# Altium PCB PCB_AD_源文件.pcbdoc
Units mil, origin at the board's own origin, x right, y up, seen from the top; angles counter-clockwise.
Board outline 2790 x 2779.26 mil, 2 copper layers (Top Layer, Bottom Layer); 60 components, 65 nets, 220 pads, 132 vias.
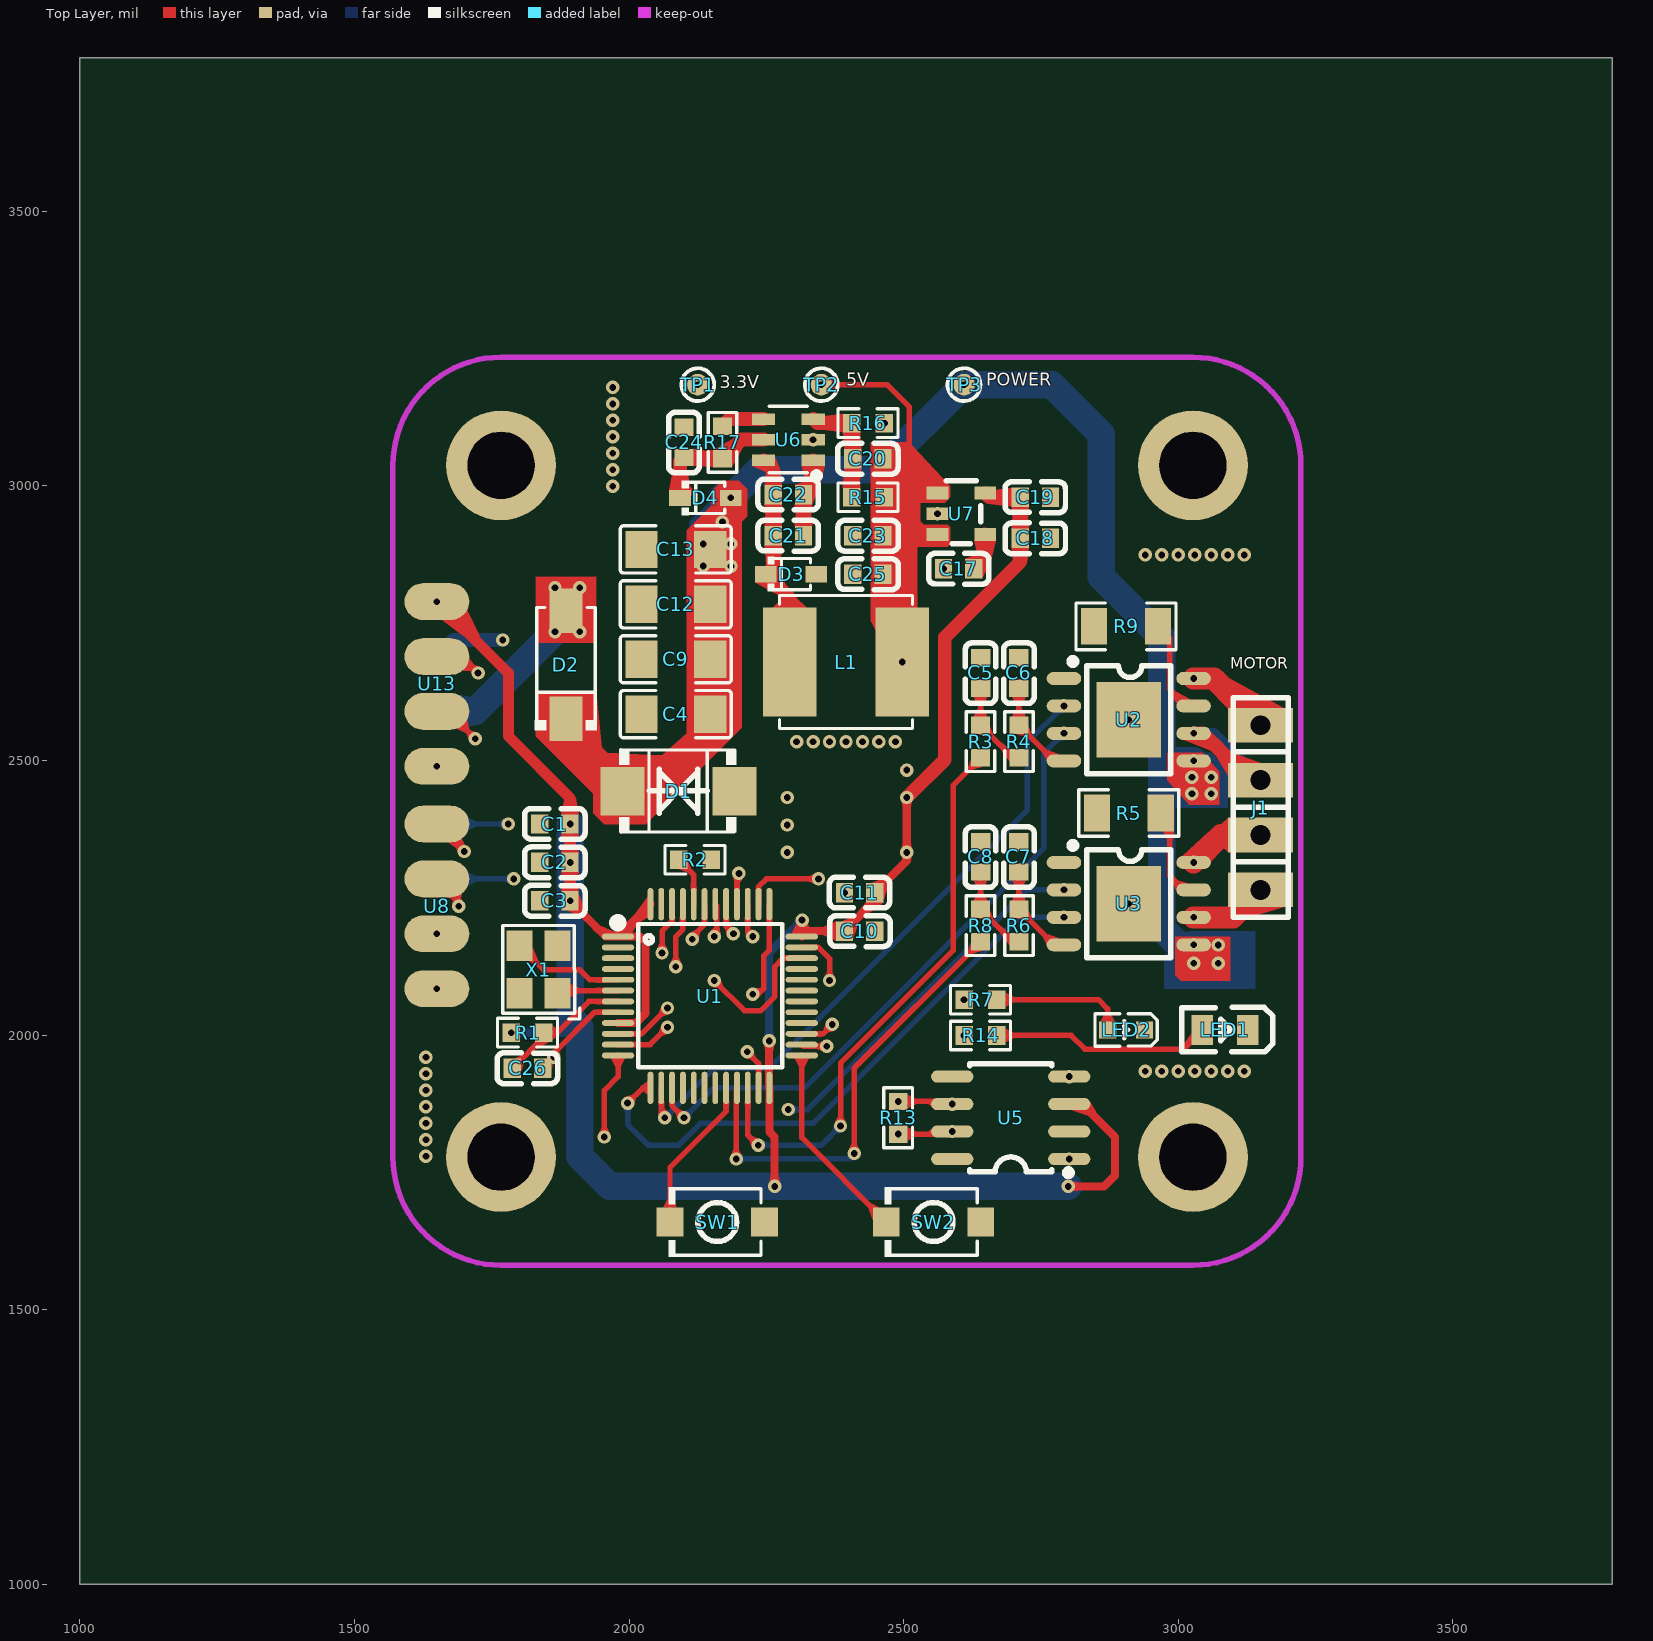
[diagram p0: Top Layer view]
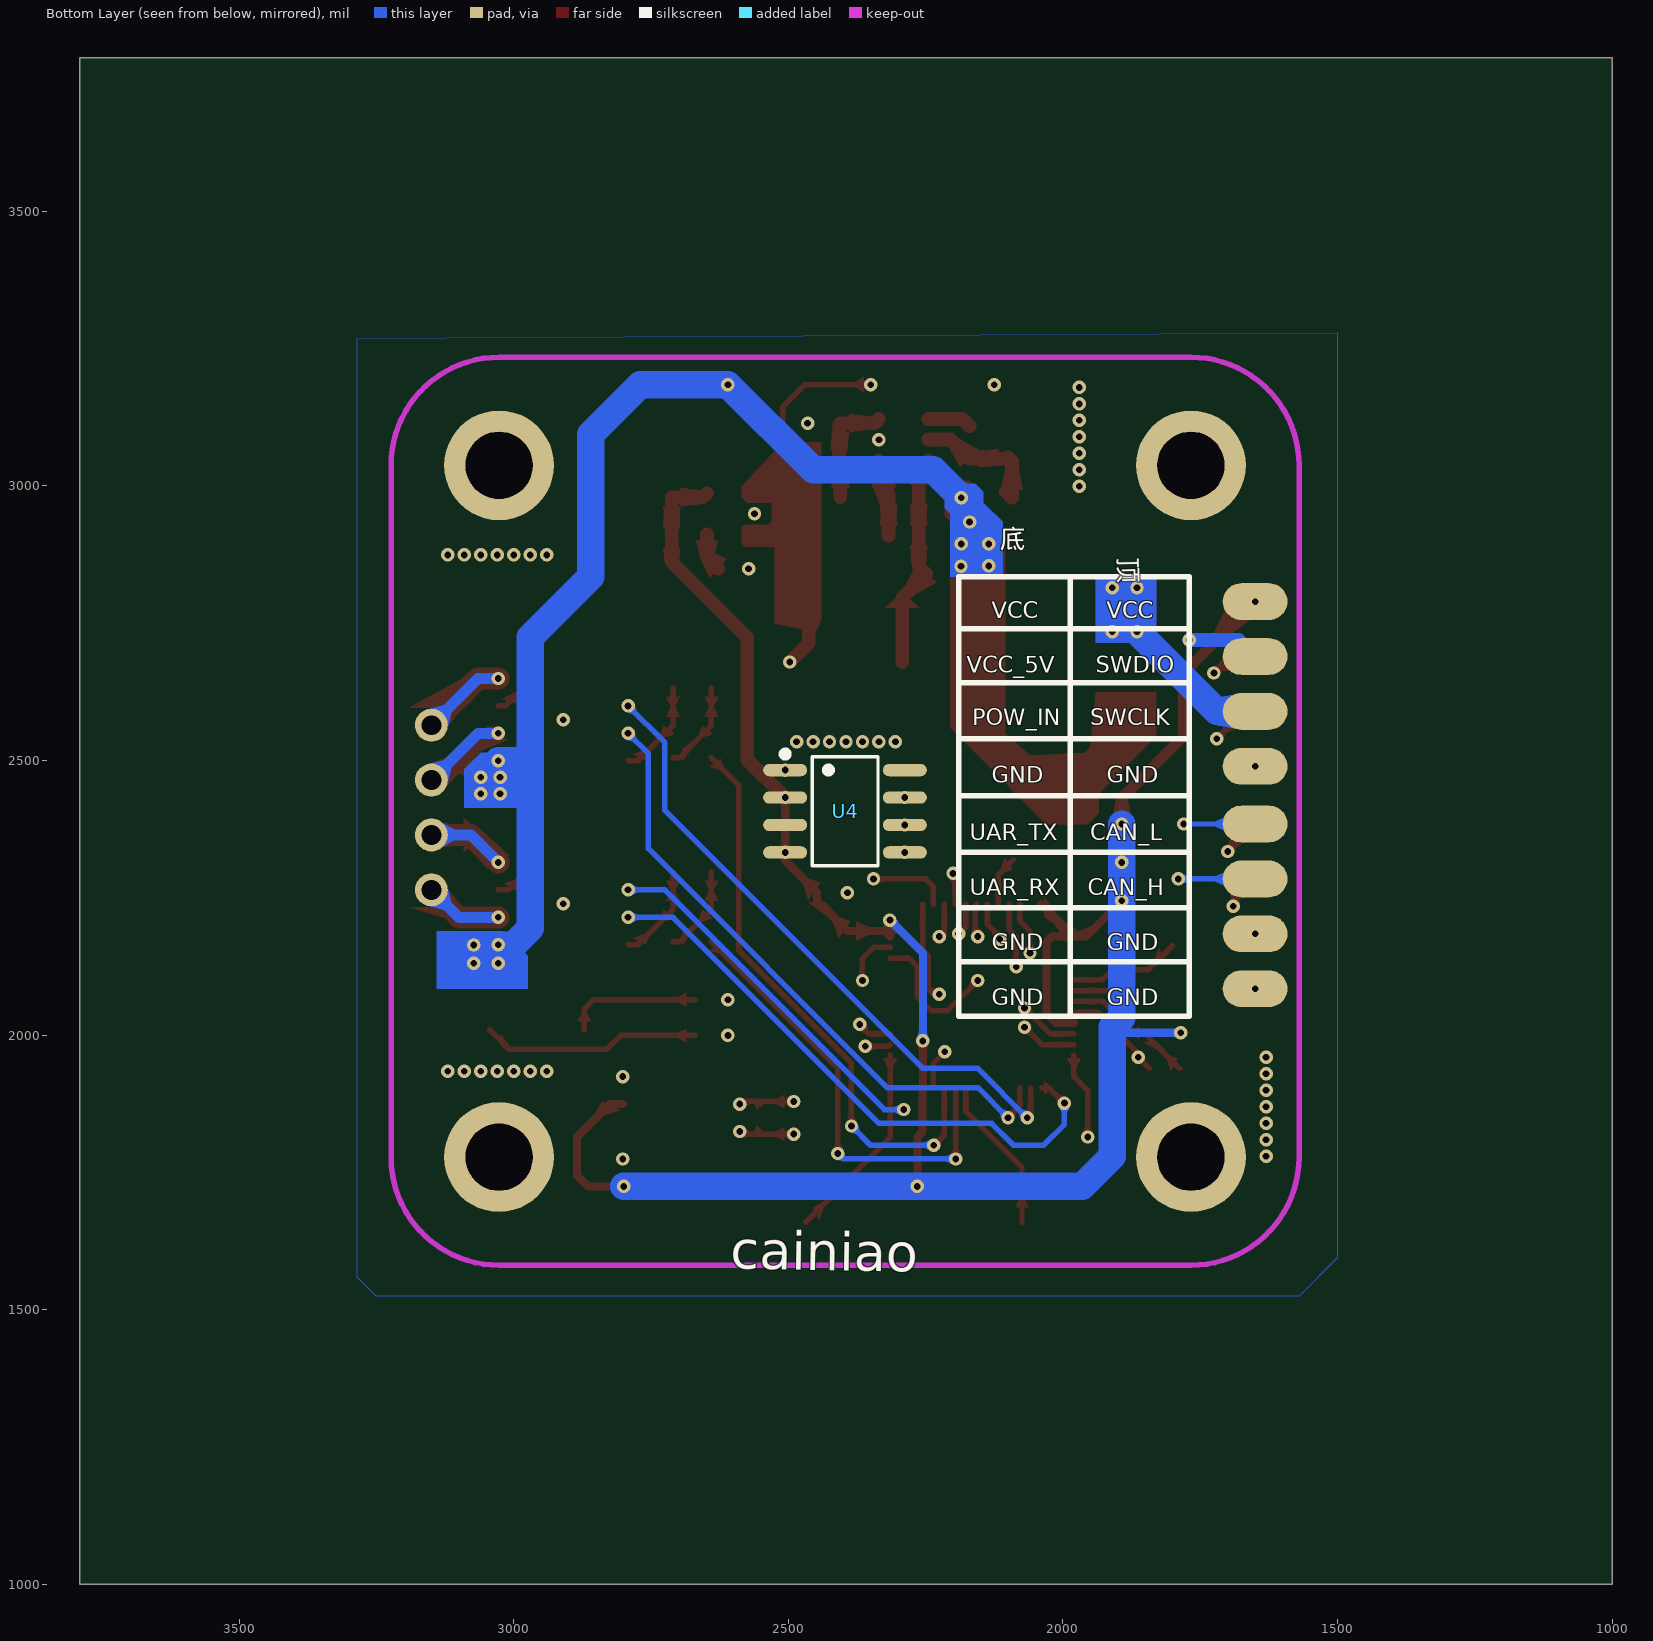
[diagram p1: Bottom Layer view, seen from below]

## Layer stack, top to bottom
Top Layer: signal copper (thickness not stored)
Dielectric: dielectric 12.6, FR-4, Dk 4.8
Bottom Layer: signal copper (thickness not stored)

## Board outline
3790,1000 1000,1000 1000,3779.26 3790,3779.26

## Components (designator, comment, footprint, x,y, rotation, side; value= is the part's Value field where it differs from the comment)
C1 "0.1u" C0603 1865,2384.26 r0 top
C2 "0.1u" C0603 1865,2314.26 r0 top
C3 "0.1u" C0603 1865,2244.26 r0 top
C4 "100uF" C1206 2085,2584.26 r0 top
C5 "0.1u" C0603 2640,2659.26 r90 top
C6 "0.1u" C0603 2710,2659.26 r90 top
C7 "0.1u" C0603 2710,2324.26 r90 top
C8 "0.1u" C0603 2640,2324.26 r90 top
C9 "100uF" C1206 2085,2684.26 r0 top
C10 "0.1u" C0603 2420,2189.26 r180 top
C11 "10nf" C0603 2420,2259.26 r0 top
C12 "100uF" C1206 2085,2784.26 r0 top
C13 "100uF" C1206 2085,2884.26 r0 top
C17 "10nf" C0603 2600,2849.26 r180 top
C18 "0.1uf" C0603 2740,2904.26 r0 top
C19 "10nf" C0603 2740,2979.26 r0 top
C20 "100pf" C0603 2435,3049.26 r0 top
C21 "0.1u" C0603 2290,2909.26 r0 top
C22 "0.1u" C0603 2290,2984.26 r0 top
C23 "10uf" C0603 2435,2909.26 r180 top
C24 "10uf/50v" C0603 2100,3079.26 r90 top
C25 "0.1u" C0603 2435,2839.26 r180 top
C26 "0.1u" C0603 1815,1939.26 r0 top
D1 "P6SMB6.8CA-C78395" SMB_L4.6-W3.6-LS5.3-BI 2090,2444.26 r180 top
D2 "SS54_C22452" SMA_L4.4-W2.8-LS5.4-R-RD 1885,2674.26 r90 top
D3 "B5819WS" SOD-323_L1.8-W1.3-LS2.5-RD 2295,2839.26 r0 top
D4 "B5819WS" SOD-323_L1.8-W1.3-LS2.5-RD 2138.84,2978.15 r0 top
J1 "CON4_1" 排针4PIN 3100,2614.26 r0 top
L1 "6.8uH" IND-SMD_L6.0-W6.0_SWPA6045S 2395,2679.26 r0 top
LED1 "17-21SURC/S530-A3/TR8" LED0805-R-RD 3085,2009.26 r180 top
LED2 "TJ-S1608SW6TGLCCW-A5" LED0603-R-RD 2905,2009.26 r180 top
R1 "10k" R0603 1815,2004.26 r0 top
R2 "10k" R0603 2120,2319.26 r0 top
R3 "1k" R0603 2640,2534.26 r90 top
R4 "1k" R0603 2710,2534.26 r90 top
R5 "100mΩ" R1206 2910,2404.26 r180 top
R6 "1k" R0603 2710,2199.26 r90 top
R7 "100" R0603 2640,2064.26 r180 top
R8 "1k" R0603 2640,2199.26 r90 top
R9 "100mΩ" R1206 2905,2744.26 r180 top
R13 "120" R0603 2490,1849.26 r270 top
R14 "100" R0603 2640,1999.26 r180 top
R15 "10k" R0603 2435,2979.26 r0 top
R16 "1.8k" R0603 2435,3114.26 r180 top
R17 "1m" R0603 2170,3079.26 r270 top
SW1 "TS-1088R-02526" SW-SMD_L3.9-W3.0-P4.45 2160.55,1659.46 r180 top
SW2 "TS-1088R-02526" SW-SMD_L3.9-W3.0-P4.45 2554.25,1659.46 r180 top
TP1 "测试点" 测试点 2125,3184.26 r0 top
TP2 "测试点" 测试点 2350,3184.26 r0 top
TP3 "测试点" 测试点 2610,3184.26 r0 top
U1 "STM32F103CBT6" LQFP-48_L7.0-W7.0-P0.50-LS9.0-BL 2147.2,2071.03 r270 top
U2 "TB67H450FNG" SOP-8_L4.9-W3.9-P1.27-LS6.0-TL-EP 2910,2574.26 r0 top
U3 "TB67H450FNG" SOP-8_L4.9-W3.9-P1.27-LS6.0-TL-EP 2910,2239.26 r0 top
U4 "MT6816CT-AKD" SOP-8_L5.0-W4.0-P1.27-LS6.0-BL 2396.77,2407.49 r90 bottom
U5 "SN65HVD232DR" SOIC-8_L5.0-W4.0-P1.27-LS6.0-BL 2695,1849.26 r90 top
U6 "ME3116" SOT-23-6_L2.9-W1.6-P0.95-LS2.8-BL 2290,3084.26 r90 top
U7 "TPLP2992IM5X-3.3" SOT-23-5_L2.9-W1.6-P0.95-LS2.8-BL 2605,2949.26 r270 top
U8 "Heaer-侧2*4" 侧焊2*4排针 1650,2184.26 r0 top
U13 "Heaer-侧2*4" 侧焊2*4排针 1650,2589.26 r0 top
X1 "12MHz" OSC-SMD_4P-L3.2-W2.5-BL 1835,2119.26 r90 top

## Footprints (in the part's own frame and the unit in brackets; to place one, negate y for a bottom-side part, rotate by r counter-clockwise, add the part's x,y. Pads: shape width x height; smd on the part's side, far side on the other; paste and mask are expansions set on the pad)
C0603 [mm]
  rect 0.8x0.9 smd paste+0 mask+0.051: 1(-0.7,0) 2(0.7,0)
  silkscreen extent -1.41,-0.71 1.39,0.72
C1206 [mm]
  rect 1.485x1.728 smd paste-100 mask+0.051: 1(-1.593,0) 2(1.593,0)
  silkscreen extent -2.56,-1.09 2.56,1.09
IND-SMD_L6.0-W6.0_SWPA6045S [mm]
  rect 2.474x5.02 smd paste+0 mask+0.051: 1(-2.603,0) 2(2.603,0)
  silkscreen extent -3.08,-3.08 3.08,3.08
LED0603-R-RD [mm]
  rect 0.8x0.8 smd paste+0 mask+0.051: 1(0.851,0) 2(-0.851,0)
  silkscreen extent -1.44,-0.75 1.44,0.75
LED0805-R-RD [mm]
  rect 1x1.4 smd paste+0 mask+0.051: 1(1.05,0) 2(-1.05,0)
  silkscreen extent -2.22,-1.04 1.99,1.01
LQFP-48_L7.0-W7.0-P0.50-LS9.0-BL [mm]
  oval 0.27x1.5 smd paste+0 mask+0.05: 1(-2.75,-4.25) 2(-2.25,-4.25) 3(-1.75,-4.25) 4(-1.25,-4.25) 5(-0.75,-4.25) 6(-0.25,-4.25) 7(0.25,-4.25) 8(0.75,-4.25) 9(1.25,-4.25) 10(1.75,-4.25) 11(2.25,-4.25) 12(2.75,-4.25) 25(2.75,4.25) 26(2.25,4.25) 27(1.75,4.25) 28(1.25,4.25) 29(0.75,4.25) 30(0.25,4.25) 31(-0.25,4.25) 32(-0.75,4.25) 33(-1.25,4.25) 34(-1.75,4.25) 35(-2.25,4.25) 36(-2.75,4.25)
  oval 1.5x0.27 smd paste+0 mask+0.05: 13(4.25,-2.75) 14(4.25,-2.25) 15(4.25,-1.75) 16(4.25,-1.25) 17(4.25,-0.75) 18(4.25,-0.25) 19(4.25,0.25) 20(4.25,0.75) 21(4.25,1.25) 22(4.25,1.75) 23(4.25,2.25) 24(4.25,2.75) 37(-4.25,2.75) 38(-4.25,2.25) 39(-4.25,1.75) 40(-4.25,1.25) 41(-4.25,0.75) 42(-4.25,0.25) 43(-4.25,-0.25) 44(-4.25,-0.75) 45(-4.25,-1.25) 46(-4.25,-1.75) 47(-4.25,-2.25) 48(-4.25,-2.75)
  silkscreen extent -3.59,-4.46 3.3,3.34
OSC-SMD_4P-L3.2-W2.5-BL [mm]
  rect 1.4x1.2 smd paste+0 mask+0.051: 1(-1.1,-0.875) 2(1.1,-0.875) 3(1.1,0.875) 4(-1.1,0.875)
  silkscreen extent -2.29,-1.9 2.03,1.65
R0603 [mil]
  rect 31.75x34.02 smd paste-3937.01 mask+2: 1(-29.65,0) 2(29.65,0)
  silkscreen extent -55,-26 55,26
R1206 [mil]
  rect 47.54x66.97 smd paste-3937.01 mask+2: 1(-58.22,0) 2(58.22,0)
  silkscreen extent -91,-42 91,42
SMA_L4.4-W2.8-LS5.4-R-RD [mil]
  rect 81.2x60.59 smd paste+0 mask+2: 1(98.57,0) 2(-98.57,0)
  silkscreen extent -119,-56 104,56
SMB_L4.6-W3.6-LS5.3-BI [mil]
  rect 80.61x88.23 smd paste+0 mask+2: 1(-102.02,0) 2(102.02,0)
  silkscreen extent -105,-75 108,75
SOD-323_L1.8-W1.3-LS2.5-RD [mm]
  rect 1x0.75 smd paste+0 mask+0.051: 1(-1.173,0) 2(1.173,0)
  silkscreen extent -1.08,-0.8 0.9,0.8
SOIC-8_L5.0-W4.0-P1.27-LS6.0-BL [mil]
  oval 22.38x76.78 smd paste+0 mask+2: 1(-75,-106.5) 2(-25,-106.5) 3(25,-106.5) 4(75,-106.5) 5(75,106.5) 6(25,106.5) 7(-25,106.5) 8(-75,106.5)
  silkscreen extent -106,-111 98,75
SOP-8_L4.9-W3.9-P1.27-LS6.0-TL-EP [mm]
  oval 1.6x0.6 smd paste+0 mask+0.051: 1(-3,1.905) 2(-3,0.635) 3(-3,-0.635) 4(-3,-1.905) 5(3,-1.905) 6(3,-0.635) 7(3,0.635) 8(3,1.905)
  rect 3x3.5 smd paste+0 mask+0.051: 9(0,0)
  silkscreen extent -2.74,-2.5 1.95,2.84
SOP-8_L5.0-W4.0-P1.27-LS6.0-BL [mil]
  oval 22.6x80.14 smd paste+0 mask+2: 1(75,108.97) 2(25,108.97) 3(-25,108.97) 4(-75,108.97) 5(-75,-108.97) 6(-25,-108.97) 7(25,-108.97) 8(75,-108.97)
  silkscreen extent -99,-60 110,115
SOT-23-5_L2.9-W1.6-P0.95-LS2.8-BL [mm]
  rect 0.6x1 smd paste+0 mask+0.05: 1(-0.95,-1.1) 2(0,-1.1) 3(0.95,-1.1) 4(0.95,1.1) 5(-0.95,1.1)
  silkscreen extent -1.52,-0.7 1.4,0.89
SOT-23-6_L2.9-W1.6-P0.95-LS2.8-BL [mm]
  rect 0.532x1.072 smd paste+0 mask+0.051: 1(-0.95,-1.149) 2(0,-1.149) 3(0.95,-1.149) 4(0.95,1.149) 5(0,1.149) 6(-0.95,1.149)
  silkscreen extent -1.82,-1.45 1.54,0.89
SW-SMD_L3.9-W3.0-P4.45 [mm]
  rect 1.23x1.36 smd paste+0 mask+0.051: 1(-2.185,0) 2(2.185,0)
  silkscreen extent -2.03,-1.62 2.25,1.62
侧焊2*4排针 [mm]
  oval 3x1.7 smd paste+0 mask+0.051: 1(0,5.08) 2(0,2.54) 3(0,0) 4(0,-2.54)
  oval 3x1.7 smd far side paste+0 mask+0.051: 5(0,5.08) 6(0,2.54) 7(0,0) 8(0,-2.54)
排针4PIN [mil]
  round 60 hole 36 paste+0 mask+4: 1(50,-50) 2(50,-150) 3(50,-250)
  round 60 hole 36 paste+0 mask+2: 4(50,-350)
  silkscreen extent 0,-400 100,0
测试点 [mm]
  round 1 smd paste+0 mask+0.102: 1(0,0)
  silkscreen extent -0.76,-0.76 0.76,0.76

## Free pads (board coordinates)
  rect 118.11x62.99 smd paste+0 mask+2: 1(3150,2264.26) 1(3150,2364.26) 1(3150,2464.26) 1(3150,2564.26)
  round 200 hole 122.05 slot 122.25 at 90 deg paste+0 mask+2: ""(1766.85,1777.57) ""(1766.85,3037.41) ""(3026.69,1777.57) ""(3026.69,3037.41)

## Via types
v1: diameter 24.41, hole 12.2, Top Layer to Bottom Layer, tented both sides, 132 vias

## Nets (pads, with @x,y where several pads share a name; then routed paths per layer and width w, separated by ;. In a path a pad name is that pad's centre, name@x,y a point inside that pad or via, vN(x,y) a via of type N, cw(c..) or ccw(c..) an arc to the next point about the centre after c; other vN are vias at no path point)
1: pad.@1766.85,3037.41
2: pad.@1766.85,1777.57
3: pad.@3026.69,3037.41
4: pad.@3026.69,1777.57
BOTTON_1: SW2.2 U1.25 | length 367
  Top Layer w10: U1.25 2314.5,1813.16 SW2.2
BOTTON_2: SW1.2 U1.20 | length 286.6
  Top Layer w10: SW1.2 2074.5,1758.76 2176.7,1860.96 U1.20@2176.7,1903.76
C7_1: C7.1 R6.2 U3.4 | length 176.4
  Top Layer w10: C7.1 2710,2228.96 2774.7,2164.26 U3.4
C8_1: C8.1 R6.1 R8.2 | length 162.3
  Top Layer w10: C8.1 2640,2228.96 2699.4,2169.56 R6.1
CAN_H: R13.2 U5.7 U8.2 | length 1270.4
  Top Layer w10: U8.2 1690,2244.26 v1(1690,2234.26) ; v1(2490,1819.6) 2583.8,1819.56 v1(2588.5,1824.26)
  Mid-Layer 1 w10: v1(1690,2234.26) 1690,2029.26 1815,1904.26 2425,1904.26 2490,1839.26 v1(2490,1819.6)
CAN_L: R13.1 U5.6 U8.1 | length 1313.8
  Top Layer w10: U8.1 v1(1700,2334.26) ; R13.1@2490,1878.96 2583.8,1878.96 v1(2588.5,1874.26)
  Mid-Layer 1 w10: v1(1700,2334.26) 1713.9,2320.36 1713.9,2040.36 1825,1929.26 2439.7,1929.26 v1@2490,1878.96
  other v1: 2490,1878.92
CAN_RX: U1.45 U5.4 | length 918.8
  Top Layer w10: v1(2085,2124.26) 2085,2179.26 2098,2192.26 U1.45
  Mid-Layer 1 w10: v1(2085,2124.26) 2601.5,2124.26 v1(2801.5,1924.26)
CAN_TX: U1.46 U5.1 | length 1214.9
  Top Layer w10: v1(2060,2149.26) 2060,2189.26 2078.3,2207.56 U1.46@2078.3,2238.36
  Mid-Layer 1 w10: v1(2060,2149.26) 2680,2149.26 2880,1949.26 2880,1839.26 2815,1774.26 v1(2801.5,1774.26)
GND: C1.1 C2.1 C3.1 C4.1 C5.2 C6.2 C7.2 C8.2 C9.1 C10.1 C11.1 C12.1 C13.1 C17.2 C18.2 C19.2 C23.2 C24.2 C25.2 C26.2 D1.1 D3.2 LED1.2 LED2.2 R2.2 R5.2 R9.2 R16.1 SW1.1 SW2.1 U1.8 U1.23 U1.35 U1.47 U2.1 U2.9 U3.1 U3.9 U4.8 U5.2 U6.2 U7.2 U8.3 U8.4 U8.7 U8.8 U13.4 U13.8 X1.2 X1.4 | length 357.1
  Top Layer w10: C26.2 1862.9,1959.56 1862.9,1967.16 1937.2,2041.46 U1.8 ; v1(2215,1969.26) 2235.8,1948.46 U1.23@2235.8,1903.76 ; U1.35 2344.6,2159.56 2365,2139.26 v1(2365,2099.26)
  other v1: 1630,1779.26 1630,1809.26 1630,1839.26 1630,1869.26 1630,1899.26 1630,1929.26 2940,1934.26 2970,1934.26 3000,1934.26 3030,1934.26 3060,1934.26 3090,1934.26 3120,1934.26 1630,1959.26 1862.85,1959.51 1650,2084.26 1650,2184.26 2910,2239.26 2392.44,2259.26 1650,2489.26 2305,2534.26 2335,2534.26 2365,2534.26 2395,2534.26 2425,2534.26 2455,2534.26 2485,2534.26 2910,2574.26 2572.44,2849.26 2940,2874.26 2970,2874.26 3000,2874.26 3030,2874.26 3060,2874.26 3090,2874.26 3120,2874.26 2561.69,2949.26 1970,2999.26 1970,3029.26 1970,3059.26 2335,3084.26 1970,3089.26 2465,3114.26 1970,3119.26 1970,3149.26 1970,3179.26
IN_AM: U1.14 U2.2 | length 1166.8
  Top Layer w10: U1.14@2058.6,1903.76 2058.6,1855.66 v1(2065,1849.26)
  Bottom Layer w10: v1(2065,1849.26) 2155,1939.26 2255,1939.26 2725,2409.26 2725,2532.36 v1(2791.89,2599.26)
IN_AP: U1.15 U2.3 | length 1146.7
  Top Layer w10: U1.15@2078.3,1903.76 2078.3,1870.96 v1(2100,1849.26)
  Bottom Layer w10: v1(2100,1849.26) 2155,1904.26 2320,1904.26 2755,2339.26 2755,2512.36 v1(2791.89,2549.26)
IN_BM: U1.12 U3.2 | length 1224.8
  Top Layer w10: v1(1955,1814.26) 1955,1899.26 1980,1924.26 ; 1980,1924.26 U1.12 1980,1924.26
  Mid-Layer 1 w10: v1(1955,1814.26) 1960,1809.26 2185,1809.26 2240,1864.26 v1(2290,1864.26)
  Bottom Layer w10: v1(2290,1864.26) 2325,1864.26 2725,2264.26 v1(2791.89,2264.26)
IN_BP: U1.13 U3.3 | length 1074.4
  Top Layer w10: v1@1997.2,1876.06 2024.9,1903.76 U1.13@2038.9,1903.76
  Bottom Layer w10: v1@1997.2,1876.06 1997.2,1837.06 2035,1799.26 2090,1799.26 2130,1839.26 2335,1839.26 2710,2214.26 v1(2791.89,2214.26)
  other v1: 1997.2,1876.03
IN_PWM_A: R3.1 U1.22 | length 1052.8
  Top Layer w10: U1.22@2216.1,1903.76 2216.1,1818.16 v1(2235,1799.26) ; v1(2385,1834.26) 2385,1949.26 2590,2154.26 2590,2454.56 R3.1
  Bottom Layer w10: v1(2235,1799.26) 2350,1799.26 v1(2385,1834.26)
IN_PWM_B: R8.1 U1.21 | length 829.8
  Top Layer w10: v1(2195,1774.26) 2195,1902.26 U1.21@2196.4,1903.76 ; v1(2410,1784.26) 2410,1939.56 R8.1
  Bottom Layer w10: v1(2195,1774.26) 2400,1774.26 v1(2410,1784.26)
LED1_1: LED1.1 R14.1 | length 398.9
  Top Layer w10: R14.1 2805,1999.26 2830,1974.26 3008.7,1974.26 LED1.1@3043.7,2009.26
LED2_1: LED2.1 R7.1 | length 247.1
  Top Layer w10: R7.1 2855,2064.26 2871.5,2047.76 LED2.1
MT6816_CS: U1.38 U4.1 | length 481.8
  Top Layer w10: U1.38@2235.8,2238.36 2235.8,2270.06 2250,2284.26 v1(2345,2284.26)
  Mid-Layer 1 w10: v1(2345,2284.26) 2465,2284.26 2480,2299.26 2480,2456.76 v1(2505.74,2482.49)
OUT_A+: J1.2 pad.1@3150,2464.26 U2.6 | length 314.2
  Top Layer w25: v1(3028.11,2549.26) 3045,2549.26 3130,2464.26 J1.2
  Bottom Layer w20: v1(3028.11,2549.26) 3065,2549.26 J1.2
OUT_A-: J1.1 pad.1@3150,2564.26 U2.8 | length 314.2
  Top Layer w40: v1(3028.11,2649.26) 3065,2649.26 J1.1
  Bottom Layer w20: v1(3028.11,2649.26) 3065,2649.26 J1.1
OUT_B+: J1.4 pad.1@3150,2264.26 U3.6 | length 285.2
  Top Layer w40: v1(3028.11,2214.26) 3100,2214.26 J1.4
  Bottom Layer w20: v1(3028.11,2214.26) 3100,2214.26 J1.4
OUT_B-: J1.3 pad.1@3150,2364.26 U3.8 | length 285.2
  Top Layer w40: v1(3028.11,2314.26) 3078.1,2364.26 J1.3
  Bottom Layer w20: v1(3028.11,2314.26) 3078.11,2364.26 J1.3
POWER: C4.2 C9.2 C12.2 C13.2 D1.2 D2.2 D4.2 TP3.1 U2.5 U3.5 | length 1920.6
  Bottom Layer w50: v1@2187.89,2975.26 v1(2185,2978.15) 2236.11,3029.26 2455,3029.26 v1(2610,3184.26) 2770,3184.26 2860,3094.26 2860,2834.26 2970,2724.26 2970,2194.26 3000,2164.26 v1(3072.76,2163.9) ; 2970,2499.26 v1(3028.11,2499.26)
  other v1: 3028.1,2130.43 3072.63,2130.57 3028.11,2164.26 3025,2439.26 3060,2439.26 3025,2469.26 3060,2469.26 2185.66,2853.49 2135,2854.26 2135,2894.26 2185,2894.26 2170,2934.26
POWER_IN: D2.1 U13.7 | length 275.1
  Bottom Layer w50: U13.7 1720,2589.26 v1(1865,2734.26)
  other v1: 1910,2734.26 1865,2814.26 1910,2814.26
R3_2: C5.1 R3.2 R4.1 | length 162.3
  Top Layer w10: C5.1 2640,2563.96 2699.4,2504.56 R4.1
S$1126: 
S$81129: 
S$81133: 
S$81137: 
S$81141: 
S$81145: 
S$81149: 
S$81153: 
S$81157: 
S$81161: 
S$81165: 
S$81169: 
SPI1_MISO: U1.40 U4.6 | length 182
  Top Layer w10: U1.40@2196.4,2238.36 2196.4,2290.66 v1(2200,2294.26)
  Mid-Layer 1 w10: v1(2200,2294.26) 2200,2294.69 v1(2287.8,2382.49)
SPI1_MOSI: U1.41 U4.5 | length 248.3
  Top Layer w10: U1.41 2176.7,2197.56 v1(2190,2184.26)
  Mid-Layer 1 w10: v1(2190,2184.26) 2287.8,2282.06 v1(2287.8,2332.49)
SPI1_SCK: U1.39 U4.7 | length 364.6
  Top Layer w10: U1.39 2216.1,2188.16 v1(2225,2179.26)
  Mid-Layer 1 w10: v1(2225,2179.26) 2315,2269.26 2315,2404.26 2287.8,2431.46 v1(2287.8,2432.49)
SWCLK: U1.37 U13.3 | length 1140.8
  Top Layer w10: U13.3 1670,2589.26 v1(1720,2539.26) ; v1(2225,2074.26) 2235,2074.26 2245,2084.26 2245,2144.26 2255.5,2154.76 U1.37
  Mid-Layer 1 w10: v1(1720,2539.26) 1730,2529.26 1730,2239.26 1895,2074.26 v1(2225,2074.26)
SWDIO: U1.34 U13.2 | length 1214.4
  Top Layer w10: U13.2 1695,2689.26 v1(1725,2659.26) ; v1(2155,2099.26) 2210,2044.26 2240,2044.26 2265,2069.26 2265,2124.26 2280.7,2139.96 U1.34@2314.5,2139.96
  Mid-Layer 1 w10: v1(1725,2659.26) 1755,2629.26 1755,2269.26 1925,2099.26 v1(2155,2099.26)
U1_5: U1.5 X1.3 | length 205.1
  Top Layer w10: X1.3 1843.9,2119.26 1910,2119.26 1928.7,2100.56 U1.5
U1_6: U1.6 X1.1 | length 112.4
  Top Layer w10: X1.1@1869.5,2075.96 1874.4,2080.86 U1.6
U1_7: C26.1 R1.2 U1.7 | length 247.5
  Top Layer w10: C26.1 1844.7,1996.56 R1.2 1870,2004.26 1926.9,2061.16 U1.7
U1_26: R14.2 U1.26 | length 305.1
  Top Layer w10: U1.26 2317.7,1979.26 v1(2360,1979.26)
  Mid-Layer 1 w10: v1(2360,1979.26) 2590,1979.26 v1(2610,1999.26)
U1_27: R7.2 U1.27 | length 321.2
  Top Layer w10: U1.27@2314.5,2002.16 2350,2002.16 2352.9,2002.16 v1(2370,2019.26)
  Mid-Layer 1 w10: v1(2370,2019.26) 2565,2019.26 v1(2610,2064.26)
U1_44: R2.1 U1.44 | length 92.2
  Top Layer w10: R2.1 2117.7,2291.86 U1.44@2117.7,2238.36
U2_4: C6.1 R4.2 U2.4 | length 176.4
  Top Layer w10: C6.1 2710,2563.96 2774.7,2499.26 U2.4
U2_7: R9.1 U2.7 | length 179.6
  Top Layer w10: R9.1 2985,2722.46 2985,2629.26 3015,2599.26 U2.7
U3_7: R5.1 U3.7 | length 175.4
  Top Layer w10: R5.1 2985,2387.46 2985,2289.26 3010,2264.26 U3.7
U6_1: C21.2 C22.2 U6.1 | length 144.9
  Top Layer w25: C21.2 C22.2 2335.2,3001.86 U6.1
U6_3: C20.1 R15.1 R16.2 U6.3 | length 209.9
  Top Layer w25: U6.3 2342.6,3114.26 R16.2 2407.4,3112.16 C20.1 2405.3,3047.16 R15.1
U6_4: R17.1 U6.4 | length 80.1
  Top Layer w25: R17.1@2170,3108.96 2182.7,3121.66 U6.4
U6_5: C24.1 D4.1 R17.2 U6.5 | length 252.4
  Top Layer w25: D4.1@2092.64,2978.15 D4.1@2103.84,2989.35 ; D4.1@2092.7,2978.16 2092.7,3044.36 C24.1 2102.1,3049.56 R17.2 2204.7,3084.26 U6.5
U6_6: C21.1 C22.1 D3.1 L1.1 U6.6 | length 398.6
  Top Layer w25: U6.6 2262.4,3029.26 C22.1 C21.1 2262.4,2852.86 D3.1 2292.5,2795.56 L1.1
U7_4: C17.1 U7.4 | length 71.2
  Top Layer w25: C17.1 2648.3,2869.96 U7.4
UART1_RX: U1.43 U8.6 | length 583.9
  Top Layer w10: v1(2115,2174.26) 2115,2179.26 2120,2184.26 2137.4,2201.66 U1.43
  Mid-Layer 1 w10: v1(1790,2284.26) 1880,2194.26 2095,2194.26 v1(2115,2174.26)
  Bottom Layer w10: U8.6 v1(1790,2284.26)
UART1_TX: U1.42 U8.5 | length 652.3
  Top Layer w10: v1(2155,2179.26) 2160,2184.26 2160,2235.36 U1.42@2157,2238.36
  Mid-Layer 1 w10: v1(1780,2384.26) 1885,2279.26 2055,2279.26 v1(2155,2179.26)
  Bottom Layer w10: U8.5 v1(1780,2384.26)
VCC: C1.2 C2.2 C3.2 C10.2 C11.2 C18.1 C19.1 R1.1 TP1.1 U1.1 U1.9 U1.24 U1.36 U1.48 U4.2 U4.4 U5.3 U7.5 U13.1 U13.5 | length 5410.1
  Top Layer w15: v1(1892.6,2384.26) v1(1892.6,2314.26) v1(1892.6,2244.26) 1957.5,2179.26 U1.1 ; U1.9@1979.9,2021.86 2012.6,2021.86 2030,2039.26 2030,2169.26 2020,2179.26 U1.1 ; U1.48@2038.9,2238.36 U1.1 ; v1(2255,1989.26) 2255,1904.16 2255.5,1903.76 2255.5,1823.76 2265,1814.26 v1(2265,1724.26) ; v1(2315,2209.26) 2315,2179.76 U1.36 2324.5,2189.26 C10.2 2447.6,2244.36 C11.2 2505.7,2317.46 v1(2505.74,2332.49) ; v1(2505.74,2332.49) v1(2505.74,2432.49) ; v1(2800,1724.26) 2865,1724.26 2885,1744.26 2885,1814.26 2825,1874.26 U5.3
  Top Layer w20: v1(1650,2789.26) 1780,2659.26 1780,2544.26 1892.6,2431.66 v1(1892.6,2384.26)
  Top Layer w25: v1(2505.74,2432.49) 2575,2501.76 2575,2724.26 2712.4,2861.66 C18.1 C19.1 2655.7,2979.26 U7.5
  Mid-Layer 1 w10: v1(1650,2789.26) 1985,2789.26 2125,2929.26 v1(2125,3184.26)
  Bottom Layer w15: v1(1785.34,2004.26) 1910,2004.26 ; v1(2255,1989.26) 2255,2149.26 v1(2315,2209.26)
  Bottom Layer w50: v1(1892.6,2384.26) v1(1892.6,2244.26) 1892.6,2031.66 1910,2014.26 1910,1879.26 1910,1779.26 1965,1724.26 v1(2800,1724.26)
VCC_5V: C20.2 C23.1 C25.1 L1.2 R15.2 TP2.1 U7.1 U7.3 U13.6 | length 1826.1
  Top Layer w10: v1(2350,3184.26) 2470,3184.26 2510,3144.26 2510,3038.36 U7.1
  Top Layer w25: C20.2 2464.7,3047.16 R15.2 ; v1(2497.48,2679.26) 2462.6,2714.16 C25.1 C23.1 2464.7,2911.36 R15.2 ; 2516.4,2986.66 2516.4,2932.86 2537.4,2911.86 U7.3 ; U7.1 2472.1,2986.66 R15.2
  Mid-Layer 1 w25: v1(1770,2719.26) 1790,2699.26 1930,2699.26 1950,2679.26 v1(2497.48,2679.26)
  Bottom Layer w25: U13.6 1680,2719.26 v1(1770,2719.26)
pads on no net: U1.2 U1.3 U1.4 U1.10 U1.11 U1.16 U1.17 U1.18 U1.19 U1.28 U1.29 U1.30 U1.31 U1.32 U1.33 U4.3 U5.5 U5.8
copper on no net: | length 212.9
  Top Layer w10: 1979.9,1982.46 2038.2,1982.46 v1(2070,2014.26) ; 1979.9,2002.16 2022.9,2002.16 v1(2070,2049.26)

## Polygon pours and split planes (outlines as drawn)
GND on Bottom Layer (solid): 1500,3279.26 1500,1594.26 1570,1524.26 3250,1524.26 3285,1559.26 3285,3269.26
GND on Top Layer (solid): 1520,3269.26 1505,3254.26 1505,1584.26 1575,1514.26 3235,1514.26 3290,1569.26 3290,3279.26

## Keep-outs
Keep-Out Layer:
  lines w10: 1570,1777.57 ccw(c1766.85,1777.57) 1766.85,1580.72 ; 1570,3037.41 cw(c1766.85,3037.41) 1766.85,3234.26 ; 3026.69,1580.72 ccw(c3026.69,1777.57) 3223.54,1777.57 ; 3026.69,3234.26 cw(c3026.69,3037.41) 3223.54,3037.41

## Other copper
Top Layer:
  region net CAN_L: 2564.8,1884.89 2557.79,1863.63 2545.4,1873.96 2548.7,1883.96
  region net CAN_H: 2564.8,1813.63 2557.79,1834.89 2545.4,1824.56 2548.7,1814.56
  region net VCC: 2838.73,1879.23 2806.12,1863.07 2836.1,1852.56 2850.4,1859.46
  region net C7_1: 2760.43,2165.2 2782.95,2176.07 2762.92,2183.12 2753.35,2178.54
  region net OUT_B-: 3008.42,2326.07 3047.79,2302.45 3092.24,2350.12 3056,2370.44
  region net U3_7: 2996.75,2262.45 3017.71,2276.07 2999.23,2282.1 2990.58,2276.61
  region net U2_4: 2760.43,2500.2 2782.95,2511.07 2762.92,2518.12 2753.35,2513.54
  region net U2_7: 2997.61,2604.02 3021.6,2611.07 2996.17,2625.16 2982.52,2624.67
  region net OUT_A+: 3059.09,2552.7 3009.05,2537.45 3057.76,2518.82 3081.86,2530.08
  region net SWCLK: 1705.14,2573.55 1686.01,2557.46 1701.39,2550.8 1709.07,2557.26
  region net VCC: 1705.18,2773.62 1658.46,2755.8 1699.32,2725.8 1727.61,2725.8
  region net SWDIO: 1708.89,2685.92 1697.28,2663.78 1713.94,2663.25 1718.8,2672.53
  region net CAN_L: 1695.15,2357.11 1670.96,2350.8 1691.39,2335.8 1705.54,2335.8
  region net CAN_H: 1695.15,2257.11 1670.96,2250.8 1682.93,2244.26 1693.54,2247.8
  region net VCC: 2033.62,2214.32 2033.62,2251.82 2011.12,2221.14 2011.12,2199.91
  region net CAN_TX: 2083.62,2214.14 2072.99,2214.14 2073.3,2207.56 2083.3,2207.56
  region net CAN_RX: 2103.31,2214.14 2092.68,2214.13 2093,2199.13 2103,2199.14
  region net U1_44: 2122.99,2262.55 2112.36,2262.57 2112.7,2277.57 2122.7,2277.55
  region net UART1_RX: 2142.68,2214.15 2132.05,2214.12 2132.4,2201.64 2142.4,2201.68
  region net SPI1_MOSI: 2182.05,2214.13 2171.42,2214.15 2171.7,2199.15 2181.7,2199.13
  region net SPI1_MISO: 2201.73,2262.56 2191.1,2262.56 2191.4,2277.56 2201.4,2277.56
  region net SPI1_SCK: 2221.42,2214.14 2210.79,2214.14 2211.1,2199.14 2221.1,2199.14
  region net MT6816_CS: 2241.09,2262.55 2230.46,2262.58 2230.8,2270.08 2240.8,2270.05
  region net SWCLK: 2260.79,2214.15 2250.16,2214.13 2250.5,2199.13 2260.5,2199.15
  region net VCC: 2296.25,2184.61 2333.75,2184.61 2322.5,2207.11 2307.5,2207.11
  region net VCC: 2313.89,2189.26 2338.6,2184.61 2327.83,2184.61 2313.89,2189.26
  region net VCC: 2329.8,2183.96 2301.1,2184.61 2327.83,2184.61 2329.8,2183.96
  region net SWDIO: 2290.33,2145.24 2290.29,2134.61 2280.68,2134.96 2280.72,2144.96
  region net U1_27: 2338.75,1996.82 2338.72,2007.45 2349.99,2007.16 2350.01,1997.16
  region net BOTTON_1: 2327,1957.45 2302,1957.45 2309.5,1942.45 2319.5,1942.45
  region net IN_PWM_A: 2221.42,1879.5 2210.79,1879.5 2211.1,1864.5 2221.1,1864.5
  region net BOTTON_2: 2182.05,1879.49 2171.42,1879.51 2171.7,1864.51 2181.7,1864.49
  region net IN_AP: 2083.62,1879.5 2072.99,1879.5 2073.3,1870.96 2083.3,1870.96
  region net IN_AM: 2063.94,1879.49 2053.31,1879.5 2053.6,1864.5 2063.6,1864.49
  region net IN_BP: 2033.62,1891.26 2033.62,1916.26 2024.9,1908.76 2024.9,1898.76
  region net IN_BM: 1992.41,1957.45 1967.41,1957.45 1974.95,1942.45 1984.95,1942.45
  region net IN_BM: 1992.41,1957.45 1967.41,1957.45 1974.95,1942.45 1984.95,1942.45
  region: 2004.1,1977.14 2004.09,1987.77 2019.09,1987.46 2019.1,1977.46
  region: 2004.1,1996.82 2004.08,2007.45 2019.08,2007.16 2019.1,1997.16
  region net U1_7: 1955.68,2055.88 1955.66,2066.51 1940.66,2066.16 1940.68,2056.16
  region net U1_6: 1955.67,2075.55 1955.67,2086.18 1940.67,2085.86 1940.67,2075.86
  region net U1_5: 1955.67,2095.24 1955.67,2105.87 1940.67,2105.56 1940.67,2095.56
  region net VCC: 1950.47,2178.2 1980.92,2184.61 1949.78,2197.61 1934.05,2192.13
  region net VCC: 1966.49,2184.61 2003.99,2184.61 2018.3,2207.11 1997.11,2207.11
  region net LED1_1: 3023.96,1981.71 3023.96,2002.02 3008.96,1981.59 3008.96,1967.45
  region net U3_7: 2972.5,2370.78 2991.99,2370.78 2990,2355.78 2980,2355.78
  region net CAN_L: 2507.01,1866.46 2507.01,1891.46 2522.01,1883.96 2522.01,1873.96
  region net CAN_H: 2507.01,1832.06 2507.01,1807.06 2522.01,1814.56 2522.01,1824.56
  region net IN_PWM_B: 2643.33,2153.73 2622.99,2168.27 2617.28,2153.91 2625.53,2148.02
  region net C8_1: 2627.5,2244.79 2652.5,2244.79 2645,2259.79 2635,2259.79
  region net C8_1: 2657.01,2227.83 2636.85,2213.04 2654.5,2207.39 2662.66,2213.37
  region net C8_1: 2692.99,2185.48 2692.99,2163.47 2677.99,2183.9 2677.99,2198.04
  region net C7_1: 2697.5,2244.79 2722.5,2244.79 2715,2259.79 2705,2259.79
  region net C7_1: 2727.01,2227.83 2706.85,2213.04 2724.5,2207.39 2732.66,2213.37
  region net R3_2: 2692.99,2520.48 2692.99,2498.47 2677.99,2518.9 2677.99,2533.04
  region net U2_4: 2697.5,2579.79 2722.5,2579.79 2715,2594.79 2705,2594.79
  region net U2_4: 2727.01,2562.83 2706.85,2548.04 2724.5,2542.39 2732.66,2548.37
  region net IN_PWM_A: 2643.33,2488.73 2622.99,2503.27 2617.28,2488.91 2625.53,2483.02
  region net R3_2: 2657.01,2562.83 2636.85,2548.04 2654.5,2542.39 2662.66,2548.37
  region net R3_2: 2627.5,2579.79 2652.5,2579.79 2645,2594.79 2635,2594.79
  region net C8_1: 2652.5,2280.95 2627.5,2280.95 2635,2265.95 2645,2265.95
  region net C7_1: 2722.5,2280.95 2697.5,2280.95 2705,2265.95 2715,2265.95
  region net U2_4: 2722.5,2615.95 2697.5,2615.95 2705,2600.95 2715,2600.95
  region net R3_2: 2652.5,2615.95 2627.5,2615.95 2635,2600.95 2645,2600.95
  region net U1_5: 1824.17,2159.05 1817.33,2135.01 1830.29,2125.77 1833.42,2136.77
  region net U1_6: 1893.07,2093.36 1893.07,2068.36 1908.07,2075.86 1908.07,2085.86
  region net VCC_5V: 2542,2998.47 2562.39,2998.47 2541.96,3013.47 2527.82,3013.47
  region net U7_4: 2667.99,2900.05 2628.62,2900.05 2635.8,2869.96 2660.8,2869.96
  region net U6_6: 2265.86,3051.59 2223.66,3036.39 2249.4,3024.58 2271.24,3038.1
  region net U6_1: 2356.34,3036.39 2314.14,3036.39 2322.7,3001.86 2347.7,3001.86
  region net BOTTON_1: 2444.01,1663.56 2454.54,1686.23 2441.33,1693.4 2436.85,1683.74
  region net BOTTON_2: 2087,1686.23 2062,1686.23 2069.5,1701.23 2079.5,1701.23
  region net U6_5: 2152.99,3065.48 2187.01,3033.73 2205.7,3067.58 2187.41,3084.65
  region net U6_5: 2152.99,3033.73 2152.99,3065.48 2115.49,3062.06 2115.49,3037.06
  region net U6_3: 2389.47,3097.25 2389.47,3131.27 2351.97,3126.76 2351.97,3101.76
  region net U6_3: 2421.22,3097.25 2389.47,3097.25 2394.9,3059.75 2419.9,3059.75
  region net U6_3: 2421.22,2996.27 2389.47,2996.27 2392.8,3033.77 2417.8,3033.77
  region net VCC_5V: 2480.53,2962.25 2448.78,2962.25 2452.2,2924.75 2477.2,2924.75
  region net VCC_5V: 2448.78,2996.27 2480.53,2996.27 2477.2,3033.77 2452.2,3033.77
  region net U1_44: 2106.22,2322.41 2091.43,2302.25 2105.89,2296.6 2111.87,2304.76
  region net U1_7: 1860.53,2016.76 1860.53,1991.76 1870,1999.26 1870,2009.26
  region net U1_7: 1853.77,1987.25 1828.78,1988.09 1814.62,1973.55 1828.31,1973.1
  region net VCC_5V: 2493.85,2778.08 2448.78,2778.08 2450.1,2815.58 2475.1,2815.58
  region net U6_6: 2261.25,2778.08 2323.75,2778.08 2305,2795.56 2280,2795.56
  region net U6_5: 2072.99,2992.91 2112.36,2992.91 2105.2,3030.41 2080.2,3030.41
  region net U6_6: 2268.52,2854.02 2229.15,2824.5 2265.5,2804.88 2285.7,2820.03
  region net VCC_5V: 2478.31,2821.54 2446.81,2821.54 2450.1,2784.04 2475.1,2784.04
  region net VCC_5V: 2446.81,2856.98 2478.31,2856.98 2475.1,2894.48 2450.1,2894.48
  region net U6_5: 2117.72,3067.45 2117.72,3035.95 2155.22,3037.06 2155.22,3062.06
  region net VCC_5V: 2446.81,2926.98 2478.31,2926.98 2477.2,2964.48 2452.2,2964.48
  region net VCC_5V: 2478.31,2891.54 2446.81,2891.54 2450.1,2854.04 2475.1,2854.04
  region net U6_6: 2246.69,3001.98 2278.19,3001.98 2274.9,3029.26 2249.9,3029.26
  region net U6_6: 2278.19,2966.54 2246.69,2966.54 2249.9,2929.04 2274.9,2929.04
  region net U6_1: 2301.81,3001.98 2333.31,2966.54 2343.52,2992.5 2326.36,3010.7
  region net U6_1: 2333.31,2966.54 2301.81,2966.54 2305.1,2929.04 2330.1,2929.04
  region net U6_6: 2278.19,2891.54 2246.69,2891.54 2249.9,2854.04 2274.9,2854.04
  region net U6_6: 2246.69,2926.98 2278.19,2926.98 2274.9,2964.48 2249.9,2964.48
  region net U6_1: 2301.81,2926.98 2333.31,2926.98 2330.1,2964.48 2305.1,2964.48
  region net U6_3: 2423.19,3031.54 2391.69,3031.54 2392.8,2994.04 2417.8,2994.04
  region net U6_3: 2391.69,3066.98 2423.19,3066.98 2419.9,3104.48 2394.9,3104.48
  region net VCC_5V: 2478.31,3031.54 2446.81,3031.54 2452.2,2994.04 2477.2,2994.04
  region net VCC: 2728.19,2961.54 2696.69,2961.54 2699.9,2924.04 2724.9,2924.04
  region net VCC: 2696.69,2961.54 2696.69,2996.98 2659.19,2991.76 2659.19,2966.76
  region net VCC: 2728.19,2886.54 2696.69,2886.54 2699.9,2861.66 2724.9,2861.66
  region net VCC: 2696.69,2921.98 2728.19,2921.98 2724.9,2959.48 2699.9,2959.48
  region net U7_4: 2611.81,2866.98 2643.31,2831.54 2656.62,2860.6 2639.46,2878.8
  region net VCC: 1908.31,2257.5 1887.14,2226.54 1908.42,2217.8 1917.04,2230.4
  region net VCC: 1876.81,2261.98 1908.31,2261.98 1900.1,2284.48 1885.1,2284.48
  region net VCC: 1876.81,2331.98 1908.31,2331.98 1900.1,2354.48 1885.1,2354.48
  region net VCC: 1908.31,2296.54 1876.81,2296.54 1885.1,2274.04 1900.1,2274.04
  region net VCC: 1876.81,2401.98 1908.31,2401.98 1902.6,2431.66 1882.6,2431.66
  region net VCC: 1908.31,2366.54 1876.81,2366.54 1885.1,2344.04 1900.1,2344.04
  region net VCC: 2463.31,2241.54 2431.81,2241.54 2411.62,2219.04 2432.85,2219.04
  region net VCC: 2442.13,2276.98 2463.31,2246.03 2472.03,2273.12 2463.41,2285.72
  region net VCC: 2376.69,2171.54 2376.69,2206.98 2354.19,2196.76 2354.19,2181.76
  region net VCC: 2386.91,2206.98 2408.19,2176.1 2416.9,2203.11 2408.24,2215.67
  region net U1_7: 1790.79,1956.98 1803.19,1935.27 1809.56,1954.35 1804.42,1963.35
  region net LED1_1: 2685.53,1986.76 2685.53,2011.76 2700.53,2004.26 2700.53,1994.26
  region net LED2_1: 2685.53,2051.76 2685.53,2076.76 2700.53,2069.26 2700.53,2059.26
  region net LED2_1: 2859,2025.01 2884,2025.01 2876.5,2040.01 2866.5,2040.01
  region net OUT_B+: 3190.94,2232.76 3090.95,2234.07 3085.86,2228.4 3127.92,2213.9
  region net OUT_B-: 3090.95,2332.76 3090.95,2395.76 3078.1,2384.26 3078.1,2344.26
  region net OUT_A+: 3090.95,2472.49 3148.95,2495.76 3096.73,2515.21 3071.49,2505.09
  region net OUT_A-: 3090.95,2594.45 3190.94,2595.76 3092.92,2649.62 3050.86,2635.12
  region net U1_27: 2370.76,2007.08 2357.82,2020.02 2354.71,2011.05 2361.79,2003.97
  region net U1_26: 2351.93,1970.11 2351.93,1988.41 2343.38,1984.26 2343.38,1974.26
  region net VCC: 1904.78,2245.01 1891.83,2232.08 1899.03,2227.2 1909.65,2237.8
  region net VCC: 1883.45,2252.33 1901.75,2252.33 1900.1,2260.88 1885.1,2260.88
  region net VCC: 1883.45,2322.33 1901.75,2322.33 1900.1,2330.88 1885.1,2330.88
  region net VCC: 1883.45,2306.19 1901.75,2306.19 1900.1,2297.64 1885.1,2297.64
  region net VCC: 1883.45,2392.33 1901.75,2392.33 1902.6,2400.88 1882.6,2400.88
  region net VCC: 1883.45,2376.19 1901.75,2376.19 1900.1,2367.64 1885.1,2367.64
  region net VCC: 2305.85,2201.19 2324.15,2201.19 2322.5,2192.64 2307.5,2192.64
  region net VCC: 2255.85,1732.33 2274.15,1732.33 2272.5,1740.88 2257.5,1740.88
  region net VCC: 1662.18,2790.02 1649.24,2777.08 1654.68,2770.44 1668.82,2784.58
  region net VCC: 2245.85,1981.19 2264.15,1981.19 2262.5,1972.64 2247.5,1972.64
  region net VCC: 2496.59,2424.42 2514.9,2424.42 2513.24,2415.87 2498.24,2415.87
  region net VCC: 2808.07,1715.11 2808.07,1733.41 2816.62,1731.76 2816.62,1716.76
  region net IN_PWM_A: 2375.85,1842.33 2394.15,1842.33 2390,1850.88 2380,1850.88
  region net IN_PWM_B: 2400.85,1792.33 2419.15,1792.33 2415,1800.88 2405,1800.88
  region net IN_BM: 1945.85,1822.33 1964.15,1822.33 1960,1830.88 1950,1830.88
  region: 2070.76,2037.08 2057.82,2050.02 2054.71,2041.05 2061.79,2033.97
  region net VCC_5V: 2358.07,3175.11 2358.07,3193.41 2366.62,3189.26 2366.62,3179.26
  region: 2070.76,2002.08 2057.82,2015.02 2054.71,2006.05 2061.79,1998.97
  region net CAN_H: 2498.09,1828.73 2498.05,1810.43 2506.6,1814.56 2506.63,1824.56
  region net CAN_L: 2498.09,1869.79 2498.05,1888.09 2506.6,1883.96 2506.63,1873.96
  region net CAN_H: 2583.35,1813.2 2578.17,1830.76 2571.09,1824.56 2574.04,1814.56
  region net CAN_L: 2583.35,1885.32 2578.17,1867.76 2571.09,1873.96 2574.04,1883.96
  region net VCC: 2514.87,2324.39 2496.56,2324.44 2498.2,2317.48 2513.2,2317.44
  region net VCC: 2496.59,2340.56 2514.9,2340.56 2513.24,2349.11 2498.24,2349.11
  region net UART1_RX: 2111.66,2186 2127.06,2176.1 2128.29,2185.47 2119.68,2191.01
  region net CAN_RX: 2075.85,2132.33 2094.15,2132.33 2090,2140.88 2080,2140.88
  region net CAN_TX: 2050.85,2157.33 2069.15,2157.33 2065,2165.88 2055,2165.88
  region net UART1_TX: 2148.7,2189.71 2166.16,2184.2 2165,2193.53 2155,2196.68
  region net SPI1_MOSI: 2190.76,2196.44 2177.82,2183.5 2174.71,2192.47 2181.79,2199.54
  region net MT6816_CS: 2336.93,2275.11 2336.93,2293.41 2328.38,2289.26 2328.38,2279.26
  region net SPI1_MISO: 2207.19,2284.39 2189.31,2288.36 2191.4,2279.15 2201.4,2276.93
  region net SWDIO: 2167.18,2100.02 2154.24,2087.08 2163.21,2083.97 2170.29,2091.05
  region net SWCLK: 2235.7,2068.38 2229.49,2085.61 2238.76,2085.09 2242.51,2074.69
  region net SPI1_SCK: 2225.76,2191.44 2212.82,2178.5 2212.57,2184.62 2219.64,2191.69
  region net IN_PWM_A: 2235.76,1811.44 2222.82,1798.5 2219.71,1807.47 2226.79,1814.54
  region net IN_PWM_B: 2185.85,1782.33 2204.15,1782.33 2200,1790.88 2190,1790.88
  region net IN_AP: 2100.76,1861.44 2087.82,1848.5 2084.71,1857.47 2091.79,1864.54
  region net IN_AM: 2053.44,1853.18 2070.34,1860.24 2063.6,1866.68 2053.6,1862.51
  region net IN_BP: 2009.38,1875.28 1996.42,1888.21 2005.39,1891.33 2012.47,1884.26
  region net CAN_H: 1695.88,2244.96 1678.65,2238.75 1679.17,2248.02 1689.57,2251.77
  region net CAN_L: 1700.76,2346.44 1687.82,2333.5 1684.71,2342.47 1691.79,2349.54
  region net SWCLK: 1720.76,2551.44 1707.82,2538.5 1704.71,2547.47 1711.79,2554.54
  region net SWDIO: 1725.76,2671.44 1712.82,2658.5 1709.71,2667.47 1716.79,2674.54
  region net VCC_5V: 2363.02,3169.5 2363.02,3199.02 2376.8,3189.26 2376.8,3179.26
  region net OUT_B+: 3120.06,2266.14 3151.88,2234.32 3135.26,2221.24 3106.98,2249.52
  region net OUT_B-: 3130.16,2341.76 3130.16,2386.76 3109.16,2384.26 3109.16,2344.26
  region net OUT_A+: 3141.4,2493 3122.56,2452.13 3107.33,2469.25 3118.48,2493.45
  region net OUT_A-: 3120.06,2562.38 3151.88,2594.2 3135.26,2607.28 3106.98,2579
  pour cut-out net MT6816_CS: 2325,2514.26 2325,2299.26 2465,2299.26 2465,2514.26
  region net POWER: 2995,2179.26 3095,2179.26 3095,2099.26 3005,2099.26 2995,2109.26
  region net POWER: 2980,2514.26 3045,2514.26 3075,2479.26 3075,2419.26 3020,2419.26 2980,2464.26
  region net VCC_5V: 2440,3079.26 2440,2829.26 2440,2754.26 2450,2734.26 2525,2749.26 2525,2859.26 2525,2889.26 2550,2889.26 2580,2889.26 2585,2894.26 2585,2924.26 2580,2929.26 2530,2929.26 2530,2954.26 2530,2969.26 2575,2969.26 2585,2979.26 2585,2999.26 2515,3074.26 2510,3079.26
  region net POWER_IN: 1830,2834.26 1830,2714.26 1940,2714.26 1940,2834.26
  region net POWER: 1830,2624.26 1940,2624.26 1950,2524.26 1960,2514.26 2055,2509.26 2060,2509.26 2105,2549.26 2105,2919.26 2150,2964.26 2150,2989.26 2170,3009.26 2200,3009.26 2215,2994.26 2215,2944.26 2205,2934.26 2205,2559.26 2165,2519.26 2030,2384.26 1955,2384.26 1935,2404.26 1935,2439.26 1830,2544.26
Mid-Layer 1:
  region net SWDIO: 1737.18,2660.02 1724.24,2647.08 1733.21,2643.97 1740.29,2651.05
  region net SWCLK: 1732.18,2540.02 1719.24,2527.08 1726.46,2525.72 1733.54,2532.8
  region net CAN_L: 1712.18,2335.02 1699.24,2322.08 1708.21,2318.97 1715.29,2326.05
  region net CAN_H: 1680.85,2226.19 1699.15,2226.19 1695,2217.64 1685,2217.64
  region net UART1_TX: 1792.18,2385.02 1779.24,2372.08 1788.21,2368.97 1795.29,2376.05
  region net UART1_RX: 1802.18,2285.02 1789.24,2272.08 1798.21,2268.97 1805.29,2276.05
  region net SPI1_SCK: 2300,2432.72 2286.5,2420.35 2295.33,2416.86 2302.71,2423.62
  region net SPI1_MISO: 2288.56,2370.31 2275.62,2383.25 2272.52,2374.28 2279.59,2367.2
  region net MT6816_CS: 2506.5,2470.31 2493.56,2483.26 2490.45,2474.28 2497.52,2467.21
  region net SPI1_SCK: 2237.18,2178.5 2224.24,2191.44 2233.21,2194.54 2240.29,2187.47
  region net SPI1_MOSI: 2278.65,2324.42 2296.95,2324.42 2292.8,2315.87 2282.8,2315.87
  region net SWCLK: 2216.93,2065.11 2216.93,2083.41 2208.38,2079.26 2208.38,2069.26
  region net SWDIO: 2146.93,2090.11 2146.93,2108.41 2138.38,2104.26 2138.38,2094.26
  region net SPI1_MISO: 2212.19,2293.72 2199.01,2306.42 2207.93,2309.69 2215.13,2302.75
  region net MT6816_CS: 2353.07,2275.11 2353.07,2293.41 2361.62,2289.26 2361.62,2279.26
  region net SPI1_MOSI: 2202.18,2183.5 2189.24,2196.44 2198.21,2199.54 2205.29,2192.47
  region net UART1_TX: 2155.76,2191.44 2142.82,2178.5 2139.71,2187.47 2146.79,2194.54
  region net CAN_TX: 2068.07,2140.11 2068.07,2158.41 2076.62,2154.26 2076.62,2144.26
  region net CAN_RX: 2093.07,2115.11 2093.07,2133.41 2101.62,2129.26 2101.62,2119.26
  region net UART1_RX: 2115.76,2186.44 2102.82,2173.5 2099.71,2182.47 2106.79,2189.54
  region net CAN_TX: 2809.57,1765.11 2809.57,1783.41 2815,1779.26 2815,1769.26
  region net CAN_RX: 2802.26,1936.44 2789.32,1923.5 2786.21,1932.47 2793.28,1939.54
  region net CAN_L: 2490.78,1891.1 2477.82,1878.18 2474.73,1887.16 2481.81,1894.22
  region net CAN_H: 2480.85,1827.67 2499.15,1827.67 2495,1836.22 2485,1836.22
  region net VCC: 2115.85,3176.19 2134.15,3176.19 2130,3167.64 2120,3167.64
  region net IN_BM: 1965.45,1820.56 1959.94,1803.1 1969.27,1804.26 1972.42,1814.26
  region net IN_BM: 2281.93,1855.11 2281.93,1873.41 2273.38,1869.26 2273.38,1859.26
  region net VCC: 1658.07,2780.11 1658.07,2798.41 1666.62,2794.26 1666.62,2784.26
  region net U1_26: 2368.07,1970.11 2368.07,1988.41 2376.62,1984.26 2376.62,1974.26
  region net U1_26: 2610.76,1987.08 2597.82,2000.02 2594.71,1991.05 2601.79,1983.97
  region net U1_27: 2378.07,2010.11 2378.07,2028.41 2386.62,2024.26 2386.62,2014.26
  region net U1_27: 2610.76,2052.08 2597.82,2065.02 2594.71,2056.05 2601.79,2048.97
Bottom Layer:
  region net POWER_IN: 1675.59,2555.8 1675.59,2622.72 1720,2614.26 1720,2564.26
  region net UART1_RX: 1706.63,2271.76 1706.63,2296.76 1721.63,2289.26 1721.63,2279.26
  region net UART1_TX: 1706.63,2371.76 1706.63,2396.76 1721.63,2389.26 1721.63,2379.26
  region net VCC: 1793.41,1995.11 1793.41,2013.41 1801.96,2011.76 1801.96,1996.76
  region net VCC: 2315.76,2197.08 2302.82,2210.02 2297.95,2202.81 2308.55,2192.21
  region net VCC: 2245.85,1997.33 2264.15,1997.33 2262.5,2005.88 2247.5,2005.88
  region net IN_PWM_A: 2385.76,1822.08 2372.82,1835.02 2369.71,1826.05 2376.79,1818.97
  region net IN_PWM_B: 2410.76,1772.08 2397.82,1785.02 2396.46,1777.8 2403.54,1770.72
  region net IN_BM: 2298.07,1855.11 2298.07,1873.41 2306.62,1869.26 2306.62,1859.26
  region net IN_AM: 2792.66,2587.08 2779.71,2600.02 2776.61,2591.04 2783.68,2583.97
  region net IN_AP: 2792.66,2537.08 2779.71,2550.02 2776.61,2541.04 2783.68,2533.97
  region net IN_BM: 2783.82,2255.11 2783.82,2273.41 2775.27,2269.26 2775.27,2259.26
  region net IN_BP: 2783.82,2205.11 2783.82,2223.41 2775.27,2219.26 2775.27,2209.26
  region net OUT_B+: 3036.18,2205.11 3036.18,2223.41 3044.73,2224.26 3044.73,2204.26
  region net OUT_B-: 3040.29,2313.5 3027.35,2326.44 3032.79,2333.08 3046.93,2318.94
  region net OUT_A+: 3036.18,2540.11 3036.18,2558.41 3044.73,2559.26 3044.73,2539.26
  region net OUT_A-: 3036.18,2640.11 3036.18,2658.41 3044.73,2659.26 3044.73,2639.26
  region net IN_PWM_A: 2243.07,1790.11 2243.07,1808.41 2251.62,1804.26 2251.62,1794.26
  region net IN_PWM_B: 2203.07,1765.11 2203.07,1783.41 2211.62,1779.26 2211.62,1769.26
  region net IN_AP: 2112.18,1848.5 2099.24,1861.44 2108.21,1864.54 2115.29,1857.47
  region net IN_AM: 2077.18,1848.5 2064.24,1861.44 2073.21,1864.54 2080.29,1857.47
  region net IN_BP: 1988.05,1867.96 2006.35,1867.96 2002.2,1859.41 1992.2,1859.41
  region net UART1_RX: 1781.93,2275.11 1781.93,2293.41 1773.38,2289.26 1773.38,2279.26
  region net UART1_TX: 1771.93,2375.11 1771.93,2393.41 1763.38,2389.26 1763.38,2379.26
  region net OUT_B+: 3120.06,2266.14 3151.88,2234.32 3128.19,2228.31 3114.05,2242.45
  region net OUT_B-: 3130.16,2341.76 3130.16,2386.76 3109.16,2374.26 3109.16,2354.26
  region net OUT_A+: 3120.06,2462.38 3151.88,2494.2 3128.19,2500.21 3114.05,2486.07
  region net OUT_A-: 3120.06,2562.38 3151.88,2594.2 3128.19,2600.21 3114.05,2586.07
  pour cut-out net MT6816_CS: 2325,2514.26 2325,2299.26 2465,2299.26 2465,2514.26
  region net POWER: 3140,2189.26 3140,2084.26 2975,2084.26 2975,2144.26 3020,2189.26
  region net POWER: 3090,2414.26 2970,2414.26 2970,2514.26 3060,2514.26 3065,2509.26 3090,2484.26
  region net POWER: 2110,2834.26 2205,2834.26 2205,2949.26 2215,2959.26 2215,2989.26 2215,2994.26 2205,3004.26 2160,3004.26 2145,2989.26 2145,2969.26 2110,2934.26
  region net POWER_IN: 1830,2834.26 1830,2714.26 1940,2714.26 1940,2834.26

## Silkscreen, mask and mechanical layers (free items; w line width, h text height)
Top Overlay:
  text "5V" at 2395,3174.26 h40
  text "POWER" at 2650,3174.26 h40
  text "3.3V" at 2165,3169.26 h40
  text "MOTOR" at 3095,2659.26 h35
Bottom Overlay:
  lines w10 net S$81129: 2190,2034.26 2190,2834.26
  lines w10 net S$81133: 1770,2034.26 2190,2034.26
  lines w10 net S$81137: 1770,2034.26 1770,2834.26 2190,2834.26
  lines w10 net S$81141: 1770,2739.73 2190,2739.73
  lines w10 net S$81145: 1770,2641.06 2190,2641.06
  lines w10 net S$81149: 1770,2539.73 2190,2539.73
  lines w10 net S$81153: 1770,2435.73 2190,2435.73
  lines w10 net S$81157: 1770,2333.06 2190,2333.06
  lines w10 net S$81161: 1770,2231.73 2190,2231.73
  lines w10 net S$81165: 1770,2133.06 2190,2133.06
  lines w10 net S$81169: 1986.87,2034.26 1986.87,2834.26
  text "底" at 2115,2874.26 h60
  text "顶" at 1910,2869.26 h60 r89
  text "VCC" at 1920,2759.26 h30
  text "VCC" at 2130,2759.26 h30
  text "SWDIO" at 1940,2659.26 h30
  text "VCC_5V" at 2175,2659.26 h30
  text "SWCLK" at 1950,2564.26 h30
  text "POW_IN" at 2165,2564.26 h30
  text "GND" at 1920,2459.26 h30
  text "GND" at 2130,2459.26 h30
  text "CAN_L" at 1950,2354.26 h30
  text "UAR_TX" at 2170,2354.26 h30
  text "CAN_H" at 1955,2254.26 h30
  text "UAR_RX" at 2170,2254.26 h30
  text "GND" at 1920,2154.26 h30
  text "GND" at 2130,2154.26 h30
  text "GND" at 1920,2054.26 h30
  text "GND" at 2130,2054.26 h30
  text "cainiao" at 2605.61,1574.27 h70 r1